# EAGLE board 210042140 ESB Lab 01 (EAGLE 9.7.0)

Size 426.75 x 352.38 mm. Coordinates in mm from the lower left corner, seen from the top.
Outline: 0,0 426.75,0 426.75,352.38 0,352.38 0,0
Copper layers (1*16): Top 0.035mm / dielectric 1.5mm / Bottom 0.035mm
Design rules "default": minimum track width 6mil, minimum drill 0.35mm, track to track 6mil, track to pad 6mil, pad to pad 6mil, via to via 6mil, smd to smd 6mil, copper to edge 40mil, drill to drill 6mil, minimum pad ring 10mil, minimum via ring 8mil, stop-mask expansion 4mil, vias tented up to drill 0mil, thermal gap 10mil

## Footprints (pad centres in the part's own frame; a part is rotated, then mirrored left to right if it is on the bottom)
BATTERY-GENERIC = drill 1.118 pad 3.15 octagon: + 2.54,0; - -2.54,0
LEDRD254W60D565H860B_B = drill 0.981 pad 1.581: 1 -1.27,0; 2 1.27,0
LEDRD254W60D565H860B_G = drill 0.981 pad 1.581: 1 -1.27,0; 2 1.27,0
LEDRD254W60D565H860B = drill 0.981 pad 1.581: 1 -1.27,0; 2 1.27,0
LEDRD254W60D565H860B_Y = drill 0.981 pad 1.581: 1 -1.27,0; 2 1.27,0
RESAD1016W63L850D250B = drill 0.83 pad 1.43: 1 -5.08,0; 2 5.08,0
ARDUINO-UNO-R3-SHIELD = drill 1.016 pad 1.88: 3.3V 24.13,-2.54; 5V 24.13,0; A0 24.13,12.7; A1 24.13,15.24; A2 24.13,17.78; A3 24.13,20.32; A4 24.13,22.86; A5 24.13,25.4; AREF -24.13,-13.97; D2 -24.13,20.32; D3 -24.13,17.78; D4 -24.13,15.24; D5 -24.13,12.7; D6 -24.13,10.16; D7 -24.13,7.62; D8 -24.13,3.81; D9 -24.13,1.27; D10 -24.13,-1.27; D11 -24.13,-3.81; D12 -24.13,-6.35; D13 -24.13,-8.89; GND@0 24.13,2.54; GND@1 24.13,5.08; GND@2 -24.13,-11.43; IOREF 24.13,-7.62; NC 24.13,-10.16; RES 24.13,-5.08; RX -24.13,25.4; SCL -24.13,-19.05; SDA -24.13,-16.51; TX -24.13,22.86; VIN 24.13,7.62

## Placement (x,y rotation side)
BATBATTERY  9V  [BATTERY-GENERIC]  108.69,320.33 180 top
D1  BLUE  [LEDRD254W60D565H860B_B]  373.53,327.23 180 top
DGREEN  GREEN  [LEDRD254W60D565H860B_G]  54.95,119.71 180 top
DLED_01  RED  [LEDRD254W60D565H860B]  108.11,344.47 180 top
DRED  RED  [LEDRD254W60D565H860B]  29.55,119.71 180 top
DYELLOW  YELLOW  [LEDRD254W60D565H860B_Y]  42.25,119.71 180 top
R1  1k  [RESAD1016W63L850D250B]  121.33,334.51 90 top
R2  1k  [RESAD1016W63L850D250B]  382.42,314.53 90 top
RGREEN  1k  [RESAD1016W63L850D250B]  61.3,107.01 90 top
RRED  1k  [RESAD1016W63L850D250B]  35.9,107.01 90 top
RYELLOW  1k  [RESAD1016W63L850D250B]  48.6,107.01 90 top
UARDUINO_02  ARDUINO-UNO-R3-SHIELD  [ARDUINO-UNO-R3-SHIELD]  47.88,29.84 270 top
UARDUINO_UNO  ARDUINO-UNO-R3-SHIELD  [ARDUINO-UNO-R3-SHIELD]  392.23,254.35 270 top

## Library data of the parts
BATBATTERY R1 R2 RGREEN RRED RYELLOW UARDUINO_02 UARDUINO_UNO = Tinkercad
D1 = Tinkercad; CATEGORY: Opto-Electronic; SUB-CATEGORY: LED; VALUE: LED_BLUE
DGREEN = Tinkercad; CATEGORY: Opto-Electronic; SUB-CATEGORY: LED; VALUE: LED_GREEN
DLED_01 DRED = Tinkercad; CATEGORY: Opto-Electronic; SUB-CATEGORY: LED; VALUE: LED_RED
DYELLOW = Tinkercad; CATEGORY: Opto-Electronic; SUB-CATEGORY: LED; VALUE: LED_YELLOW

## Nets
BATBATTERY+: BATBATTERY.+ DLED_01.1
BATBATTERY-: BATBATTERY.- R1.1
D1_A: D1.1 R2.2
DGREEN_A: DGREEN.1 RGREEN.2
DLED_01_C: DLED_01.2 R1.2
DRED_A: DRED.1 RRED.2
DYELLOW_A: DYELLOW.1 RYELLOW.2
UARDUINO_02_D8: RGREEN.1 UARDUINO_02.D8
UARDUINO_02_D9: RYELLOW.1 UARDUINO_02.D9
UARDUINO_02_D10: RRED.1 UARDUINO_02.D10
UARDUINO_02_GND: DGREEN.2 DRED.2 DYELLOW.2 UARDUINO_02.GND@0 UARDUINO_02.GND@1 UARDUINO_02.GND@2
UARDUINO_UNO_D8: R2.1 UARDUINO_UNO.D8
UARDUINO_UNO_GND: D1.2 UARDUINO_UNO.GND@0 UARDUINO_UNO.GND@1 UARDUINO_UNO.GND@2

## Tracks (layer width: path | path; a pad name or v marks a point on that pad's centre or on a via)
BATBATTERY+  (1 unrouted)
BATBATTERY-  (1 unrouted)
D1_A  (1 unrouted)
DGREEN_A  (1 unrouted)
DLED_01_C  (1 unrouted)
DRED_A  (1 unrouted)
DYELLOW_A  (1 unrouted)
UARDUINO_02_D8  (1 unrouted)
UARDUINO_02_D9  (1 unrouted)
UARDUINO_02_D10  (1 unrouted)
UARDUINO_02_GND  (5 unrouted)
UARDUINO_UNO_D8  (1 unrouted)
UARDUINO_UNO_GND  (3 unrouted)